# EAGLE board base3-5pin-interface (EAGLE 6.5.0)
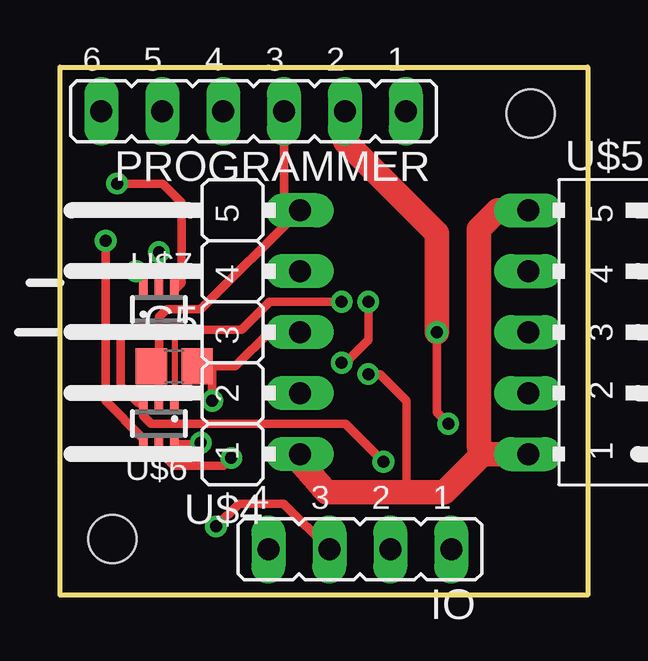
[diagram p0: board, top side]
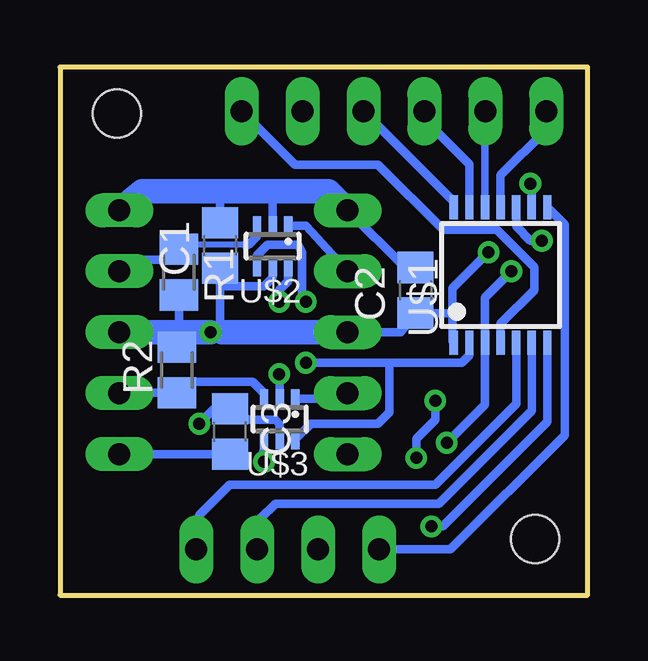
[diagram p1: board, bottom side, seen from below]

Size 22 x 22 mm. Coordinates in mm from the lower left corner, seen from the top.
Outline: 0,0 0,22 22,22 22,0 0,0
Copper layers (1*16): Top 0.035mm / dielectric 1.5mm / Bottom 0.035mm
Design rules "default": minimum track width 10mil, minimum drill 24mil, track to track 8mil, track to pad 8mil, pad to pad 8mil, via to via 8mil, smd to smd 8mil, copper to edge 40mil, drill to drill 8mil, minimum pad ring 10mil, minimum via ring 8mil, stop-mask expansion 4mil, vias tented up to drill 0mil, thermal gap 10mil
Holes 2 mm at 2.18,2.34 19.63,20.07

## Footprints (pad centres in the part's own frame; a part is rotated, then mirrored left to right if it is on the bottom)
C0805 = smd 1.3 x 1.5: 1 -0.95,0; 2 0.95,0
JUMPER4M = drill 0.914 long: 1 -3.81,0; 2 -1.27,0; 3 1.27,0; 4 3.81,0
JUMPER6M = drill 0.914 long: 1 -6.35,0; 2 -3.81,0; 3 -1.27,0; 4 1.27,0; 5 3.81,0; 6 6.35,0
M0805 = smd 1.3 x 1.6: 1 -0.95,0; 2 0.95,0
TSSOP14 = smd 0.35 x 1: 1 -1.95,-2.825; 2 -1.3,-2.825; 3 -0.65,-2.825; 4 0,-2.825; 5 0.65,-2.825; 6 1.3,-2.825; 7 1.95,-2.825; 8 1.95,2.825; 9 1.3,2.825; 10 0.65,2.825; 11 0,2.825; 12 -0.65,2.825; 13 -1.3,2.825; 14 -1.95,2.825
SC70-6L = smd 0.35 x 0.8: 1 -0.65,-0.85; 2 0,-0.85; 3 0.65,-0.85; 4 0.65,0.85; 5 0,0.85; 6 -0.65,0.85
JUMPER5 = drill 0.914 long: 1 -5.08,-2.54; 2 -2.54,-2.54; 3 0,-2.54; 4 2.54,-2.54; 5 5.08,-2.54
JUMPER5F = drill 0.914 long: 1 5.08,-2.54; 2 2.54,-2.54; 3 0,-2.54; 4 -2.54,-2.54; 5 -5.08,-2.54

## Placement (x,y rotation side)
C1  100nF  [C0805]  15.32,14.57 90 bottom
C2  100nF  [C0805]  7.17,12.7 90 bottom
C3  100nF  [C0805]  14.91,6.81 270 bottom
C5  100nF  [C0805]  4.76,9.53 0 top
IO  [JUMPER4M]  12.5,1.91 180 top
PROGRAMMER  [JUMPER6M]  8.07,20.16 180 top
R1  [M0805]  17.04,13.46 270 bottom
R2  [M0805]  17.12,9.38 90 bottom
U$1  16F103-TSSOP  [TSSOP14]  3.63,13.34 0 bottom
U$2  NC7SB3157P6X  [SC70-6L]  13.13,14.54 180 bottom
U$3  NC7SB3157P6X  [SC70-6L]  12.84,7.33 180 bottom
U$4  JUMPER5  [JUMPER5]  7.46,10.95 90 top
U$5  JUMPER5F  [JUMPER5F]  22.07,10.95 270 top
U$6  NC7SB3157P6X  [SC70-6L]  4.13,7.14 180 top
U$7  NC7SB3157P6X  [SC70-6L]  4.13,11.91 0 top

## Library data of the parts
C1-C3 C5 = rcl
IO PROGRAMMER U$1-U$7 = !stavebnice03
R1 R2 = resistor

## Nets
GND: C1.2 C2.2 C3.2 C5.1 PROGRAMMER.3 U$1.14 U$2.2 U$3.2 U$4.1 U$4.5 U$5.1 U$5.5 U$6.2 U$7.2
N$1: U$1.3 U$6.6 U$7.6
N$2: U$1.10 U$6.4
N$3: U$1.9 U$7.4
N$5: U$2.1 U$4.4
N$6: U$2.4 U$6.1 U$7.3
N$7: R2.1 U$3.3 U$5.2
N$8: U$3.1 U$4.2
N$9: U$1.2 U$2.6 U$3.6
N$10: U$3.4 U$6.3 U$7.1
N$11: PROGRAMMER.6 U$1.11
N$12: IO.1 U$1.5
N$13: PROGRAMMER.1 U$1.4
N$14: PROGRAMMER.4 U$1.13
N$15: PROGRAMMER.5 U$1.12
N$16: IO.3 U$1.7
N$17: IO.2 U$1.6
N$18: IO.4 U$1.8
N$20: R1.1 U$2.3 U$5.4
VCC: C1.1 C2.1 C3.1 C5.2 PROGRAMMER.2 R1.2 R2.2 U$1.1 U$2.5 U$3.5 U$4.3 U$5.3 U$6.5 U$7.5

## Tracks (layer width: path | path; a pad name or v marks a point on that pad's centre or on a via)
GND  (via drill 0.5)
  Top 0.356: PROGRAMMER.3 9.34,16.69 U$4.5 5.87,11.91 4.45,11.91 4.13,11.59 U$7.2 4.13,9.53 | U$6.2 4.13,9.53 | C5.1 4.13,9.53 | v12.86,9.21 13.34,9.21 14.45,8.1 14.45,4.29
  Top 1.016: U$5.5 18.26,16.03 17.46,15.24 17.46,6.19 17.78,5.87 U$5.1 17.62,5.87 16.03,4.29 14.45,4.29 11.11,4.29 10,5.56 U$4.1
  Bottom 0.356: U$5.1 14.92,5.87 C3.2 | C2.2 7.62,13.65 U$4.5 | U$2.2 13.13,16.47 13.02,16.83 | C1.2 15.32,16.75 15.24,16.83 | U$1.14 5.58,16.4 PROGRAMMER.3 | U$3.2 12.84,9.19 v12.86,9.21
  Bottom 1.016: U$4.5 10.79,16.83 13.02,16.83 15.24,16.83 18.57,16.83 U$5.5
N$1  (via drill 0.5)
  Top 0.356: U$6.6 5.5,6.29 v5.87,6.35 | U$7.6 3.48,13.19 v3.17,13.49
  Bottom 0.356: v5.87,6.35 4.29,7.94 U$1.3 4.28,12.39 v3.17,13.49
N$2  (via drill 0.5)
  Top 0.356: U$6.4 3.48,6.52 1.91,8.1 v1.91,14.76
  Bottom 0.356: U$1.10 2.98,15.36 2.38,14.76 v1.91,14.76
N$3  (via drill 0.5)
  Top 0.356: v2.38,17.14 4.29,17.14 5.08,16.35 5.08,13.02 4.82,12.76 U$7.4
  Bottom 0.356: U$1.9 2.33,17.09 v2.38,17.14
N$5
  Bottom 0.356: U$2.1 11.73,15.38 U$4.4
N$6  (via drill 0.5)
  Top 0.254: U$7.3 U$6.1
  Top 0.356: U$7.3 7.56,11.06 8.73,12.22 v11.75,12.22
  Bottom 0.356: U$2.4 13.78,14.16 13.34,14.61 12.06,14.61 11.91,14.29 11.91,12.38 v11.75,12.22
N$7
  Bottom 0.356: R2.1 19.51,8.43 U$5.2 | R2.1 16.84,8.43 16.51,8.1 | R2.1 16.5,8.89 13.97,8.89 13.49,8.41 U$3.3
N$8
  Bottom 0.356: U$3.1 10.23,8.18 U$4.2
N$9  (via drill 0.5)
  Top 0.356: v11.75,9.68 11.91,9.68 12.86,10.64 v12.86,12.22
  Bottom 0.356: U$1.2 4.92,10 5.24,9.68 8.26,9.68 | 8.26,9.68 8.26,7.62 8.73,7.14 11.53,7.14 U$3.6 | v11.75,9.68 8.26,9.68 | U$2.6 12.48,13.08 12.86,12.7 v12.86,12.22
N$10  (via drill 0.5)
  Top 0.356: U$7.1 3.42,11.11 2.86,11.11 2.54,10.79 2.54,8.73 3.28,7.99 U$6.3 3.48,7.48 3.81,7.14 11.91,7.14 v13.49,5.56
  Bottom 0.356: U$3.4 13.52,5.69 v13.49,5.56
N$11
  Bottom 0.356: U$1.11 3.63,17.49 1.75,19.37 1.75,20.14 PROGRAMMER.6
N$12
  Bottom 0.356: U$1.5 2.98,7.98 6.35,4.6 14.92,4.6 16.19,3.33 16.19,2.19 IO.1
N$13
  Bottom 0.356: U$1.4 3.63,11.29 2.22,12.7 2.22,13.65 3.79,15.22 6.01,15.22 8.73,17.94 12.2,17.94 PROGRAMMER.1
N$14
  Bottom 0.356: U$1.13 4.93,17.95 6.83,19.84 6.83,20.14 PROGRAMMER.4
N$15
  Bottom 0.305: U$1.12 4.28,18.4 PROGRAMMER.5
N$16  (via drill 0.5)
  Top 0.356: v6.51,2.86 7.46,3.81 9.33,3.81 IO.3
  Bottom 0.356: U$1.7 1.68,7.21 6.03,2.86 v6.51,2.86
N$17
  Bottom 0.356: U$1.6 2.33,7.67 6.19,3.81 13.02,3.81 13.65,3.17 13.65,2.19 IO.2
N$18
  Bottom 0.356: U$1.8 0.95,15.44 0.95,6.67 5.71,1.91 IO.4
N$20
  Bottom 0.254: 14.29,14.61 17,14.61 R1.1
  Bottom 0.356: U$2.3 13.78,14.95 14.13,14.61 14.29,14.61 | 17.16,14.29 R1.1 17.39,13.97 18.89,13.97 U$5.4
VCC  (via drill 0.5)
  Top 0.356: v16.19,7.14 15.72,7.62 v15.72,10.95 | U$6.5 4.13,6.03 4.76,5.4 6.83,5.4 v7.14,5.71 | 4.13,12.54 U$7.5 v4.13,14.29 | C5.2 6.35,9.53 | v6.35,8.1 6.35,9.53 | 6.35,9.53 7.3,9.53 8.73,10.95 U$4.3
  Top 1.016: PROGRAMMER.2 11.88,18.91 15.72,15.08 v15.72,10.95
  Bottom 0.254: 6.97,11.56 C2.1 | U$1.1 5.63,10.57
  Bottom 0.356: 10.95,10.95 U$4.3 7.78,10.96 C2.1 5.63,11.75 | v15.72,10.95 15.24,10.95 | C1.1 15.32,12.86 | 15.32,12.86 15.32,11.03 15.24,10.95 | R1.2 17.04,10.9 17.3,10.95 17.14,10.95 17.12,10.93 R2.2 | U$1.1 5.58,10.46 | v6.35,8.1 6.35,7.3 7.14,6.51 v7.14,5.71 | v4.13,14.29 5.63,12.79 5.63,11.75 | 15.25,10.95 15.24,10.95 | U$2.5 13.13,13.22 13.49,12.86 15.32,12.86 | 5.63,10.57 5.63,11.75 | 15.09,10.94 15.08,10.95 | U$3.5 12.84,7.12 13.02,7.3 14.13,7.3 C3.1 15.57,7.76 v16.19,7.14
  Bottom 1.016: U$5.3 17.3,10.95 | 17.14,10.95 v15.72,10.95 | 15.24,10.95 15.08,10.95 U$4.3